# Altium PCB 1mm_18um_2layers_std.PcbDoc
Units mm, origin at the board's own origin, x right, y up, seen from the top; angles counter-clockwise.
Board outline 50 x 90 mm, 2 copper layers (Top Layer, Bottom Layer), stack 1.036 mm thick; 25 components, 14 nets, 63 pads, 4 vias.
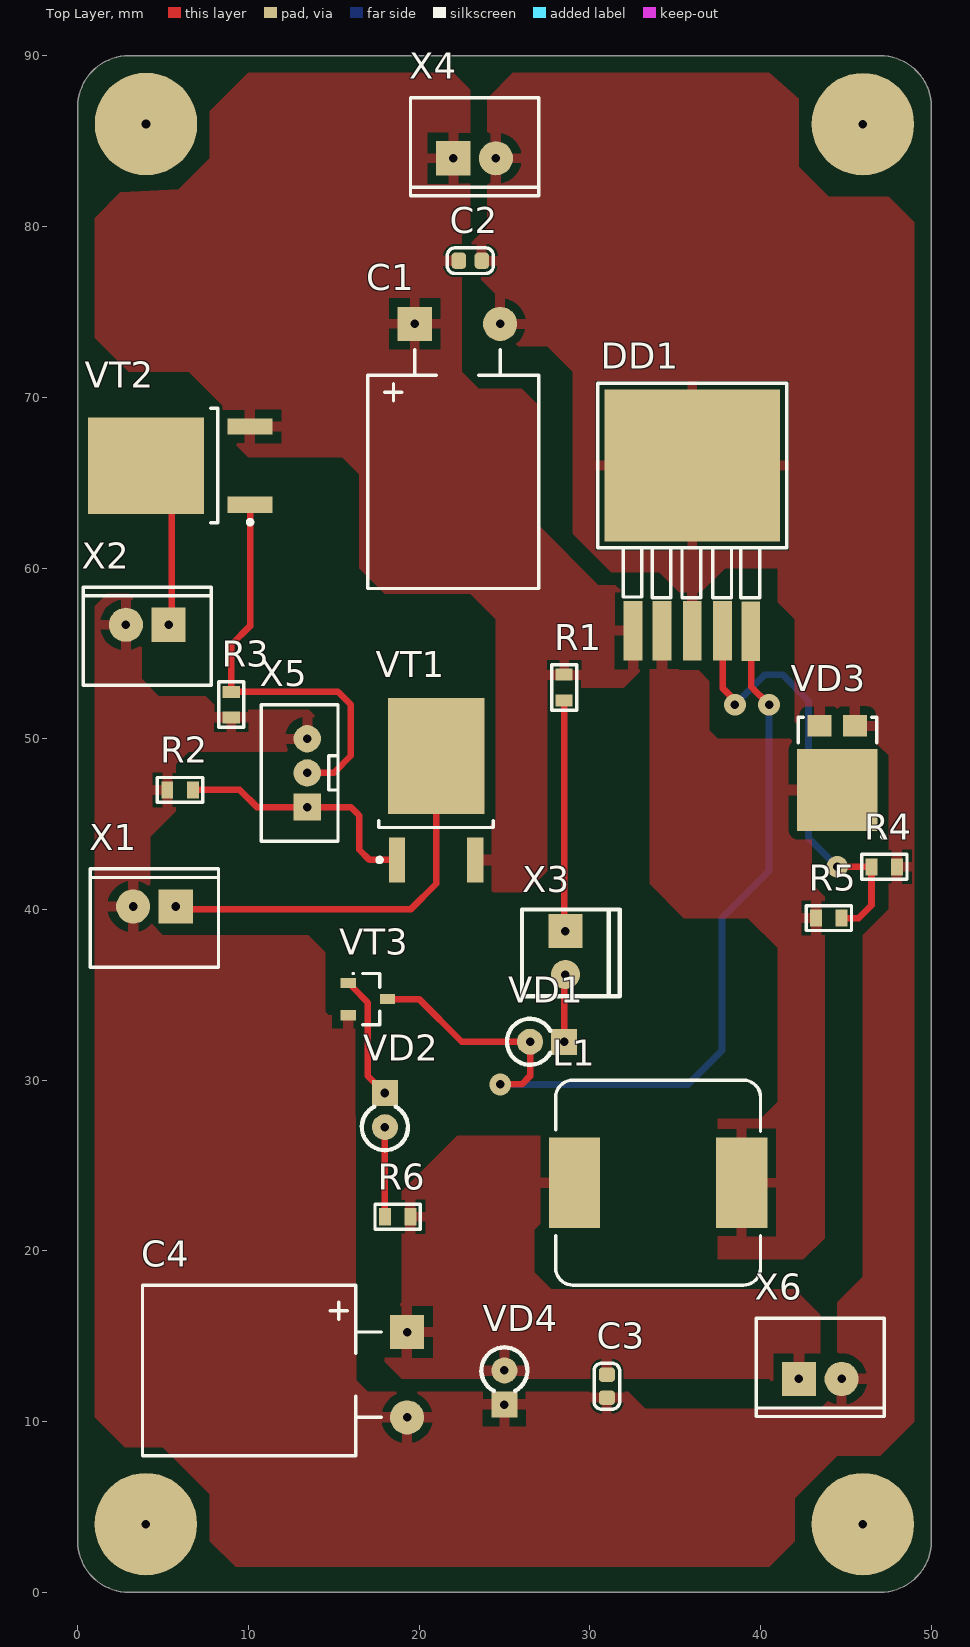
[diagram p0: Top Layer view]
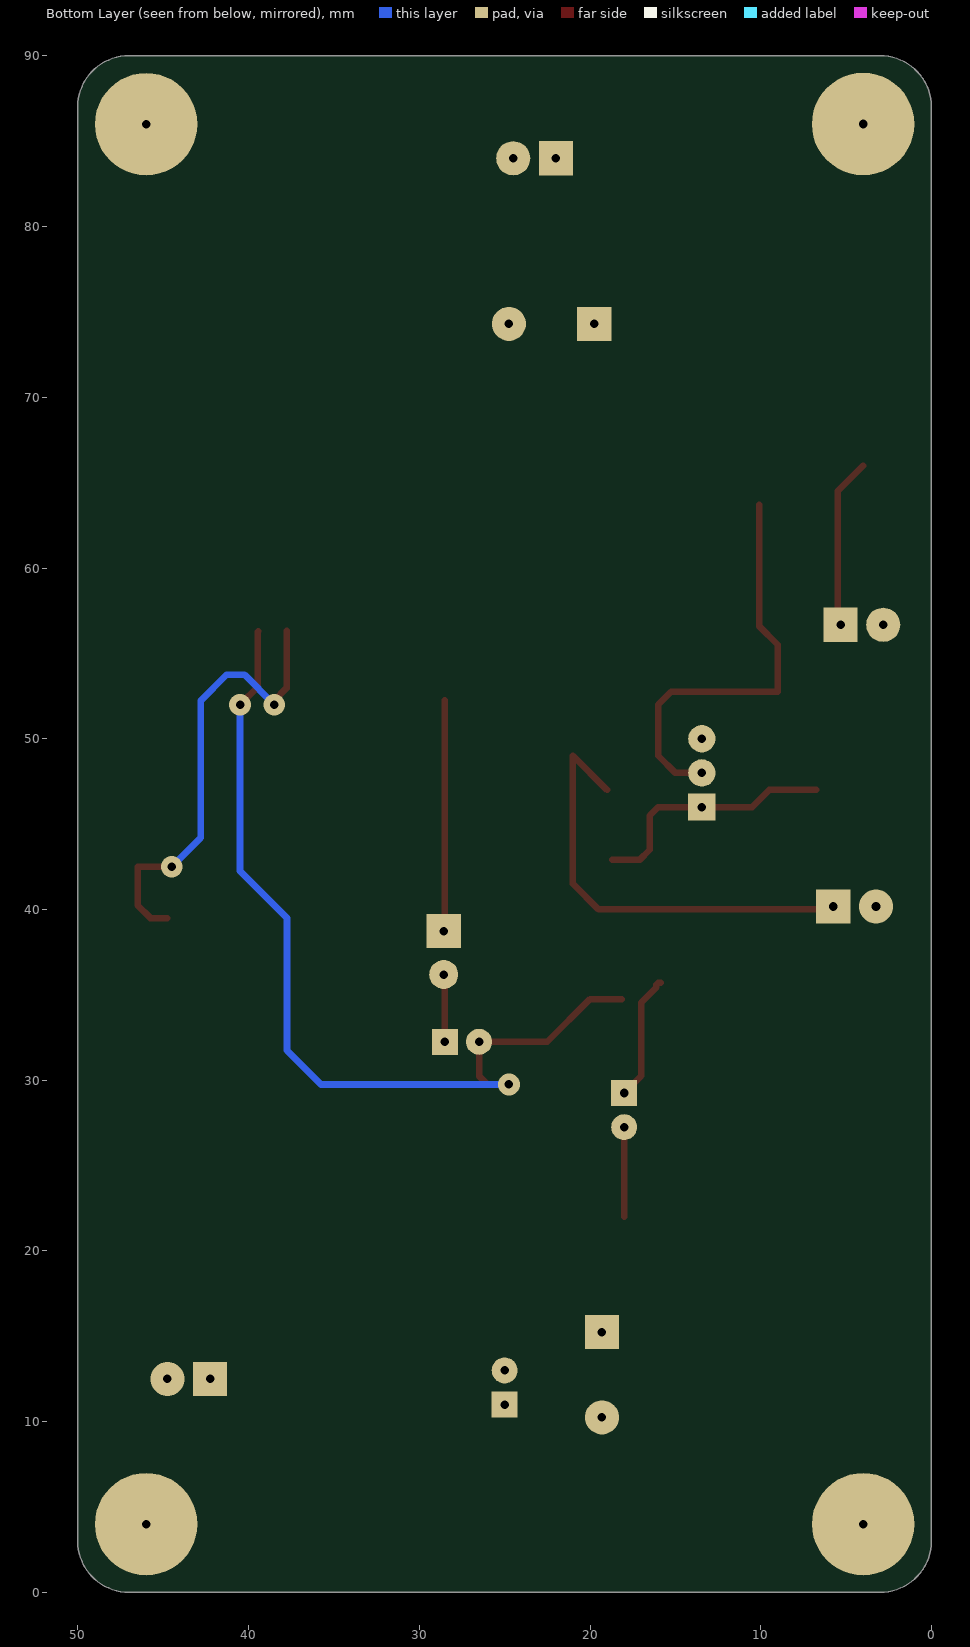
[diagram p1: Bottom Layer view, seen from below]
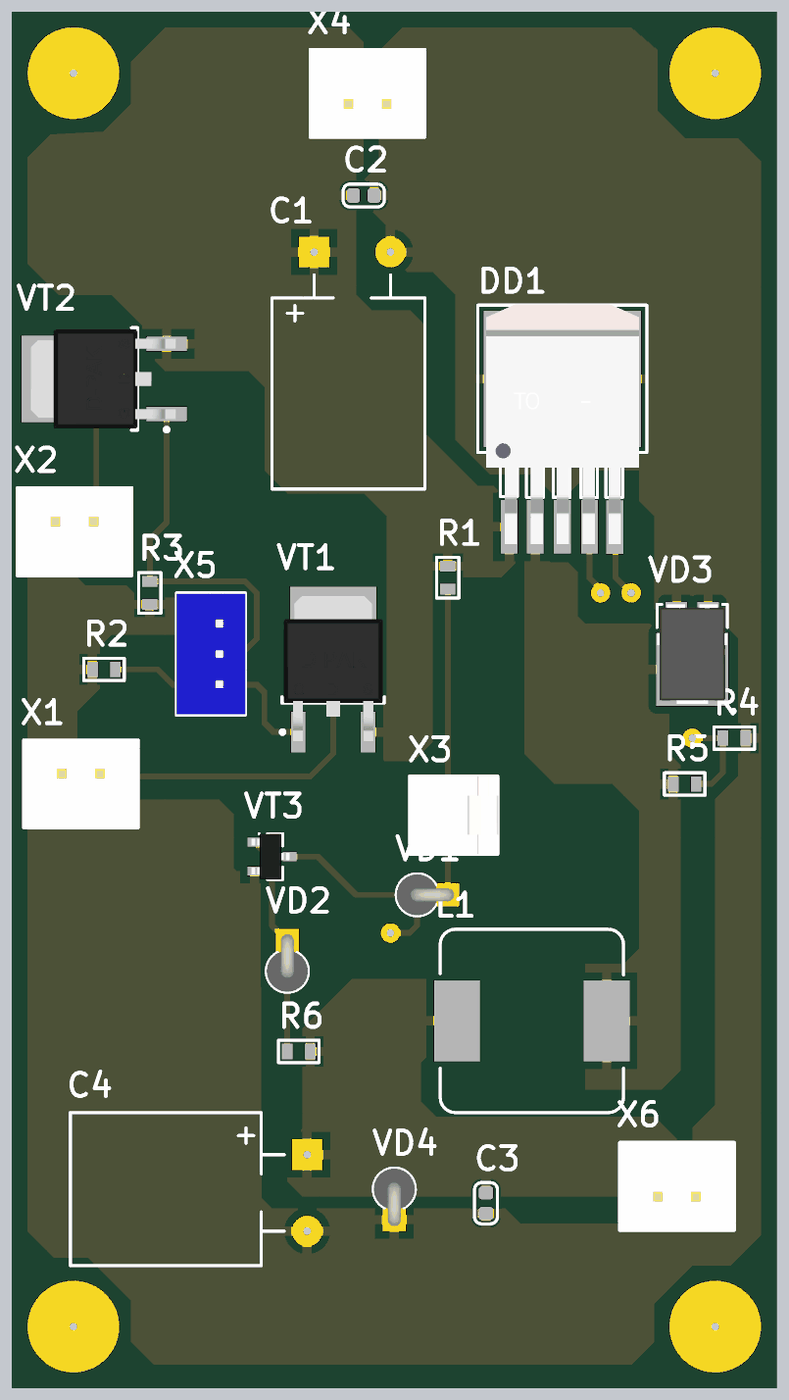
[diagram p2: 3D render of the assembled board from above, using the file's embedded part models]

## Layer stack, top to bottom
Top Solder: solder mask 0.0102, Solder Resist, Dk 3.5
Top Layer: signal copper 0.018
Core 1: core 1, FR4, Dk 4.6
Bottom Layer: signal copper 0.018
Bottom Solder: solder mask 0.0102, Solder Resist, Dk 3.5

## Board outline
0.006,3.006 0.006,87.006 cw(c3.006,87.006) 3.006,90.006 47.006,90.006 cw(c47.006,87.006) 50.006,87.006 50.006,3.006 cw(c47.006,3.006) 47.006,0.006 3.006,0.006 cw(c3.006,3.006)

## Design rules (kind name [scope] priority, off if disabled: settings)
AcuteAngle min_acute_angle [OnCopper] p1: minimum=3.50000000000000E+0001 checktracksonly=FALSE // Минимальный угол между примитивами топологии
BoardOutlineClearance board_outline_clearance_std [NOT (OnLayer('Bottom Overlay') OR OnLayer('Top Overlay'))] p1: gap=0.25 ignorepadtopadclearanceinfootprint=FALSE except(0: Arc-SplitContinuation Track-SplitContinuation SMDPad-SplitContinuation THPad-SplitContinuation Via-SplitContinuation Fill-SplitContinuation Poly-SplitContinuation Region-SplitContinuation Text-SplitContinuation) // Отступ элементов топологии от края фрезеруемой печатной платы
Clearance clearance_outer_18um_std [OnTopLayer OR OnBottomLayer] p1: gap=0.125 ignorepadtopadclearanceinfootprint=TRUE except(0.2: Arc-Fill Arc-Poly Track-Fill Track-Poly SMDPad-SMDPad SMDPad-Fill SMDPad-Poly THPad-Fill THPad-Poly Via-Fill Via-Poly Fill-Fill Fill-Poly Poly-Poly Poly-Region Poly-Text; 0.25: Arc-Hole Track-Hole SMDPad-Hole THPad-Hole Via-Hole Fill-Hole Poly-Hole Region-Hole Text-Hole) // Зазоры на внешних слоях
Clearance clearance_inner_18um_std [NOT (OnTopLayer Or OnBottomLayer)] p2: gap=0.125 ignorepadtopadclearanceinfootprint=FALSE except(0.2: Arc-Fill Arc-Poly Track-Fill Track-Poly SMDPad-SMDPad SMDPad-Fill SMDPad-Poly THPad-Fill THPad-Poly Via-Fill Via-Poly Fill-Fill Fill-Poly Poly-Poly Poly-Region Poly-Text; 0.25: Arc-Hole Track-Hole SMDPad-Hole THPad-Hole Via-Hole Fill-Hole Poly-Hole Region-Hole Text-Hole) // Зазоры на внутренних слоях
ComponentClearance [All] p1: gap=0 collisioncheckmode=3 verticalgap=0 showdistances=FALSE
DiffPairsRouting diff_pairs_routing [All] p1: maxlimit=0.127 minlimit=0.127 mostfreqgap=0.127 toplayer_minwidth=0.143 toplayer_maxwidth=0.143 toplayer_prefwidth=0.143 bottomlayer_minwidth=0.143 bottomlayer_maxwidth=0.143 bottomlayer_prefwidth=0.143 impedanceprofiledriven=TRUE impedanceprofileid={FD46899E-B5A2-4EF5-A302-5D2DB6A51F35} maxuncoupledlength=12.7 // Правила трассировки дифференциальных пар
HoleSize min_hole_size_std [IsPad] p1: absolutevalues=TRUE maxlimit=5.9 minlimit=0.6 maxpercent=80.000 minpercent=20.000 // Диаметр межслойного переходного отверстия
HoleSize min_hole_size_via_std [IsVia] p2: absolutevalues=TRUE maxlimit=5.9 minlimit=0.3 maxpercent=80.000 minpercent=20.000 // Минимальный диаметр монтажного отверстия
HoleToHoleClearance hole_to_hole_clearance_std [All] p1: gap=0.2 allowstackedmicrovias=FALSE // Минимальное расстояние между краями двух отверстий
MinimumAnnularRing min_via_ar_std [All] p1: minimumring=0.15 // Поясок площадки переходного отверстия (Annular ring VIA)
MinimumAnnularRing min_pad_ar_std [All] p2: minimumring=0.2 // Поясок монтажной контактной площадки (Annular ring PAD)
MinimumSolderMaskSliver min_solder_mask_bridge_std [All] p1: minsoldermaskwidth=0.15 // Мнимальная ширина масочного мостика
PlaneClearance plane_clearance_18um_std [All] p1: clearance=0.2 // Отступ полигона (для слоя plane) от элементов топологии
PlaneConnect [All] p1: planeconnectstyle=Relief reliefexpansion=0.5 reliefentries=4 reliefconductorwidth=0.2 reliefairgap=0.2
PolygonConnect poly_connect_to_pad<=0.3 [(AsMM(PadXSize_AllLayers)<=0.301) or (AsMM(PadYSize_AllLayers)<=0.301)] p1: thpad.connectstyle=Relief thpad.reliefconductorwidth=0.2 thpad.reliefentries=4 thpad.polygonreliefangle="90 Angle" thpad.airgapwidth=0.2 smdpad.connectstyle=Relief smdpad.reliefconductorwidth=0.2 smdpad.reliefentries=4 smdpad.polygonreliefangle="90 Angle" smdpad.airgapwidth=0.2 via.connectstyle=Direct via.reliefconductorwidth=0.254 via.reliefentries=4 via.polygonreliefangle="90 Angle" via.airgapwidth=0.254 // Правила подключения полигонов для падов от 0,3мм и меньше
PolygonConnect poly_connect_to_pad<=0.4 [(AsMM(PadXSize_AllLayers)<=0.401) or (AsMM(PadYSize_AllLayers)<=0.401)] p2: thpad.connectstyle=Relief thpad.reliefconductorwidth=0.26 thpad.reliefentries=4 thpad.polygonreliefangle="90 Angle" thpad.airgapwidth=0.2 smdpad.connectstyle=Relief smdpad.reliefconductorwidth=0.26 smdpad.reliefentries=4 smdpad.polygonreliefangle="90 Angle" smdpad.airgapwidth=0.2 via.connectstyle=Direct via.reliefconductorwidth=0.254 via.reliefentries=4 via.polygonreliefangle="90 Angle" via.airgapwidth=0.254 // Правила подключения полигонов для падов от 0,4 и меньше
PolygonConnect poly_connect_to_pad<=0.6 [(AsMM(PadXSize_AllLayers)<=0.601) or (AsMM(PadYSize_AllLayers)<=0.601)] p3: thpad.connectstyle=Relief thpad.reliefconductorwidth=0.33 thpad.reliefentries=4 thpad.polygonreliefangle="90 Angle" thpad.airgapwidth=0.2 smdpad.connectstyle=Relief smdpad.reliefconductorwidth=0.33 smdpad.reliefentries=4 smdpad.polygonreliefangle="90 Angle" smdpad.airgapwidth=0.2 via.connectstyle=Direct via.reliefconductorwidth=0.254 via.reliefentries=4 via.polygonreliefangle="90 Angle" via.airgapwidth=0.254 // Правила подключения полигонов для падов от 0,6мм и меньше
PolygonConnect poly_connect_to_pad<=0.7 [(AsMM(PadXSize_AllLayers)<=0.701) or (AsMM(PadYSize_AllLayers)<=0.701)] p4: thpad.connectstyle=Relief thpad.reliefconductorwidth=0.46 thpad.reliefentries=4 thpad.polygonreliefangle="90 Angle" thpad.airgapwidth=0.2 smdpad.connectstyle=Relief smdpad.reliefconductorwidth=0.46 smdpad.reliefentries=4 smdpad.polygonreliefangle="90 Angle" smdpad.airgapwidth=0.2 via.connectstyle=Direct via.reliefconductorwidth=0.254 via.reliefentries=4 via.polygonreliefangle="90 Angle" via.airgapwidth=0.254 // Правила подключения полигонов для падов от 0,7мм и меньше
PolygonConnect poly_connect_to_pad<=0.8 [(AsMM(PadXSize_AllLayers)<=0.8)or(AsMM(PadYSize_AllLayers)<=0.8)] p5: thpad.connectstyle=Relief thpad.reliefconductorwidth=0.53 thpad.reliefentries=4 thpad.polygonreliefangle="90 Angle" thpad.airgapwidth=0.3 smdpad.connectstyle=Relief smdpad.reliefconductorwidth=0.53 smdpad.reliefentries=4 smdpad.polygonreliefangle="90 Angle" smdpad.airgapwidth=0.2 via.connectstyle=Direct via.reliefconductorwidth=0.254 via.reliefentries=4 via.polygonreliefangle="90 Angle" via.airgapwidth=0.254 // Правила подключения полигонов для падов от 0,8мм и меньше
PolygonConnect poly_connect_to_pad<=1 [(AsMM(PadXSize_AllLayers)<=1.01)or(AsMM(PadYSize_AllLayers)<=1.01)] p6: thpad.connectstyle=Relief thpad.reliefconductorwidth=0.6 thpad.reliefentries=4 thpad.polygonreliefangle="90 Angle" thpad.airgapwidth=0.3 smdpad.connectstyle=Relief smdpad.reliefconductorwidth=0.6 smdpad.reliefentries=4 smdpad.polygonreliefangle="90 Angle" smdpad.airgapwidth=0.2 via.connectstyle=Direct via.reliefconductorwidth=0.254 via.reliefentries=4 via.polygonreliefangle="90 Angle" via.airgapwidth=0.254 // Правила подключения полигонов для падов от 1мм и меньше
PolygonConnect poly_connect_to_pad<=1.3 [(AsMM(PadXSize_AllLayers)<=1.31)or(AsMM(PadYSize_AllLayers)<=1.31)] p7: thpad.connectstyle=Relief thpad.reliefconductorwidth=0.66 thpad.reliefentries=4 thpad.polygonreliefangle="90 Angle" thpad.airgapwidth=0.3 smdpad.connectstyle=Relief smdpad.reliefconductorwidth=0.86 smdpad.reliefentries=4 smdpad.polygonreliefangle="90 Angle" smdpad.airgapwidth=0.2 via.connectstyle=Direct via.reliefconductorwidth=0.254 via.reliefentries=4 via.polygonreliefangle="90 Angle" via.airgapwidth=0.254 // Правила подключения полигонов для падов от 1,3мм и меньше
PolygonConnect poly_connect_to_pad<=1.6 [(AsMM(PadXSize_AllLayers)<=1.61)or(AsMM(PadYSize_AllLayers)<=1.61)] p8: thpad.connectstyle=Relief thpad.reliefconductorwidth=0.8 thpad.reliefentries=4 thpad.polygonreliefangle="90 Angle" thpad.airgapwidth=0.3 smdpad.connectstyle=Relief smdpad.reliefconductorwidth=1 smdpad.reliefentries=4 smdpad.polygonreliefangle="90 Angle" smdpad.airgapwidth=0.2 via.connectstyle=Direct via.reliefconductorwidth=0.254 via.reliefentries=4 via.polygonreliefangle="90 Angle" via.airgapwidth=0.254 // Правила подключения полигонов для падов от 1,6мм и меньше
PolygonConnect poly_connect_to_pad<=1.8 [(AsMM(PadXSize_AllLayers)<=1.8)or(AsMM(PadYSize_AllLayers)<=1.8)] p9: thpad.connectstyle=Relief thpad.reliefconductorwidth=1 thpad.reliefentries=4 thpad.polygonreliefangle="90 Angle" thpad.airgapwidth=0.3 smdpad.connectstyle=Relief smdpad.reliefconductorwidth=1.2 smdpad.reliefentries=4 smdpad.polygonreliefangle="90 Angle" smdpad.airgapwidth=0.2 via.connectstyle=Direct via.reliefconductorwidth=0.254 via.reliefentries=4 via.polygonreliefangle="90 Angle" via.airgapwidth=0.254 // Правила подключения полигонов для падов от 1,8мм и меньше
PolygonConnect poly_connect_to_pad<=2 [(AsMM(PadXSize_AllLayers)<=2.01)or(AsMM(PadYSize_AllLayers)<=2.01)] p10: thpad.connectstyle=Relief thpad.reliefconductorwidth=1.1 thpad.reliefentries=4 thpad.polygonreliefangle="90 Angle" thpad.airgapwidth=0.3 smdpad.connectstyle=Relief smdpad.reliefconductorwidth=1.4 smdpad.reliefentries=4 smdpad.polygonreliefangle="90 Angle" smdpad.airgapwidth=0.2 via.connectstyle=Direct via.reliefconductorwidth=0.254 via.reliefentries=4 via.polygonreliefangle="90 Angle" via.airgapwidth=0.254 // Правила подключения полигонов для падов от 2мм и меньше
PolygonConnect poly_connect_to_pad<=2.3 [(AsMM(PadXSize_AllLayers)<=2.31)or(AsMM(PadYSize_AllLayers)<=2.31)] p11: thpad.connectstyle=Relief thpad.reliefconductorwidth=1.2 thpad.reliefentries=4 thpad.polygonreliefangle="90 Angle" thpad.airgapwidth=0.3 smdpad.connectstyle=Relief smdpad.reliefconductorwidth=1.4 smdpad.reliefentries=4 smdpad.polygonreliefangle="90 Angle" smdpad.airgapwidth=0.2 via.connectstyle=Direct via.reliefconductorwidth=0.254 via.reliefentries=4 via.polygonreliefangle="90 Angle" via.airgapwidth=0.254 // Правила подключения полигонов для падов от 2,3мм и меньше
PolygonConnect poly_connect_to_pad<=2.5 [(AsMM(PadXSize_AllLayers)<=2.51)or(AsMM(PadYSize_AllLayers)<=2.51)] p12: thpad.connectstyle=Relief thpad.reliefconductorwidth=1.2 thpad.reliefentries=4 thpad.polygonreliefangle="90 Angle" thpad.airgapwidth=0.3 smdpad.connectstyle=Relief smdpad.reliefconductorwidth=1.4 smdpad.reliefentries=4 smdpad.polygonreliefangle="90 Angle" smdpad.airgapwidth=0.2 via.connectstyle=Direct via.reliefconductorwidth=0.254 via.reliefentries=4 via.polygonreliefangle="90 Angle" via.airgapwidth=0.254 // Правила подключения полигонов для падов от 2,5мм и меньше
PolygonConnect poly_connect_to_pad<=2.7 [(AsMM(PadXSize_AllLayers)<=2.71)or(AsMM(PadYSize_AllLayers)<=2.71)] p13: thpad.connectstyle=Relief thpad.reliefconductorwidth=1.4 thpad.reliefentries=4 thpad.polygonreliefangle="90 Angle" thpad.airgapwidth=0.3 smdpad.connectstyle=Relief smdpad.reliefconductorwidth=1.6 smdpad.reliefentries=4 smdpad.polygonreliefangle="90 Angle" smdpad.airgapwidth=0.2 via.connectstyle=Direct via.reliefconductorwidth=0.254 via.reliefentries=4 via.polygonreliefangle="90 Angle" via.airgapwidth=0.254 // Правила подключения полигонов для падов от 2,7мм и меньше
PolygonConnect poly_connect_to_pad<=3 [(AsMM(PadXSize_AllLayers)<=3.01)or(AsMM(PadYSize_AllLayers)<=3.01)] p14: thpad.connectstyle=Relief thpad.reliefconductorwidth=1.6 thpad.reliefentries=4 thpad.polygonreliefangle="90 Angle" thpad.airgapwidth=0.3 smdpad.connectstyle=Relief smdpad.reliefconductorwidth=1.8 smdpad.reliefentries=4 smdpad.polygonreliefangle="90 Angle" smdpad.airgapwidth=0.2 via.connectstyle=Direct via.reliefconductorwidth=0.254 via.reliefentries=4 via.polygonreliefangle="90 Angle" via.airgapwidth=0.254 // Правила подключения полигонов для падов от 3мм и меньше
PolygonConnect poly_connect_to_pad<=7 [(AsMM(PadXSize_AllLayers)<7.01)or(AsMM(PadYSize_AllLayers)<=7.01)] p15: thpad.connectstyle=Relief thpad.reliefconductorwidth=2 thpad.reliefentries=4 thpad.polygonreliefangle="90 Angle" thpad.airgapwidth=0.4 smdpad.connectstyle=Relief smdpad.reliefconductorwidth=2 smdpad.reliefentries=4 smdpad.polygonreliefangle="90 Angle" smdpad.airgapwidth=0.3 via.connectstyle=Direct via.reliefconductorwidth=0.254 via.reliefentries=4 via.polygonreliefangle="90 Angle" via.airgapwidth=0.254 // Правила подключения полигонов для падов от 7мм и меньше
PolygonConnect poly_connect_to_pad [All] p16: thpad.connectstyle=Relief thpad.reliefconductorwidth=0.25 thpad.reliefentries=4 thpad.polygonreliefangle="90 Angle" thpad.airgapwidth=0.2 smdpad.connectstyle=Relief smdpad.reliefconductorwidth=0.25 smdpad.reliefentries=4 smdpad.polygonreliefangle="90 Angle" smdpad.airgapwidth=0.2 via.connectstyle=Direct via.reliefconductorwidth=0.25 via.reliefentries=4 via.polygonreliefangle="90 Angle" via.airgapwidth=0.2 // Правила подключения полигонов общие
RoutingCorners [All] p1 off: cornerstyle=45-Degree minsetback=2.5 maxsetback=2.5
RoutingVias [All] p1: holewidth=0.3 width=0.6 viastyle="Through Hole" minholewidth=0.3 minwidth=0.6 maxholewidth=5.9 maxwidth=6.4
SilkToSilkClearance silk_to_silk_clearance_std [All] p1 off: silktosilkclearance=0.15 // Отступ текста шелкографии от других примитивов шелкографии
SilkToSolderMaskClearance silk_to_solder_mask_clearance_std [IsPad] p1 off: minsilkscreentomaskgap=0.15 clearancetoexposedcopper=FALSE // Минимальное расстояние между элементами шелкографии и вскрытой медью
SolderMaskExpansion solder_mask_expansion_std [All] p1: expansion=0.05 istentingtop=FALSE // Припуск паяльной масски
UnRoutedNet [All] p1: checkbadconnections=TRUE
Width width_18um_std [All] p1: maxlimit=10 minlimit=0.125 preferedwidth=0.15 checkconnectedcopper=TRUE // Ширина проводников (общая)
19 further rules are at their usual default settings.

## Components (designator, comment, footprint, x,y, rotation, side; value= is the part's Value field where it differs from the comment)
C1 "470мк" CAPALUM_10x12.5 22,67 r90 top
C2 "0,1мк" C0603 23,78 r180 top
C3 "0,1мк" C0603 31,12.075 r90 top
C4 "470мк" CAPALUM_10x12.5 12,13 r0 top
DD1 "LM2596" D2PAK_5 35.85,60.675 r0 top
L1 "NoName" CDRH124 34,24 r180 top value=47мк
R1 "10к" R0603 28.5,53 r270 top
R2 "10к" R0603 6,47 r0 top
R3 "10к" R0603 9,52 r90 top
R4 "1к" R0603 47.25,42.5 r180 top
R5 "3к" R0603 44,39.5 r180 top
R6 "4,7к" R0603 18.75,22 r0 top
VD1 "1N4007" "DO-41 VERTICAL" 26.5,32.25 r270 top
VD2 "BZX85C5V1" "DO-41 VERTICAL" 18,27.25 r0 top
VD3 "10S45SP" TO-277A 44.5,48 r270 top
VD4 "BZX85C5V1" "DO-41 VERTICAL" 25,13 r180 top
VT1 "30N06" D-PAK 21,47 r90 top
VT2 "30N06" D-PAK 6,66 r180 top
VT3 "BC847B" SOT23-3 17,34.75 r0 top
X1 "DS1069-2M (CWF-2)" CWF-2 4.5,39.5 r180 top
X2 "DS1069-2M (CWF-2)" CWF-2 4.076,56 r180 top
X3 "640456-2" JST-640456-2 31.75,40 r180 top
X4 "DS1069-2M (CWF-2)" CWF-2 23.25,84.675 r0 top
X5 "DS1066-03M (MW-3M)" MW-3M 13,48 r90 top
X6 "DS1069-2M (CWF-2)" CWF-2 43.5,13.175 r0 top

## Footprints (in the part's own frame and the unit in brackets; to place one, negate y for a bottom-side part, rotate by r counter-clockwise, add the part's x,y. Pads: shape width x height; smd on the part's side, far side on the other; paste and mask are expansions set on the pad)
C0603 [mm] "Chip Capacitor, 2-Leads, Body 1,60x0,80mm, IPC Medium Density"
  rrect50% 0.85x0.95 smd: 1(-0.675,0) 2(0.675,0)
  Top Layer pour cut-out: -0.254,0.5 -0.254,-0.5 0.254,-0.5 0.254,0.5
  silkscreen extent -1.35,-0.75 1.35,0.75, body extent -0.85,-0.45 0.85,0.45, height 0.9
CAPALUM_10x12.5 [mm] "Электролитический алюминиевый конденсатор с радиальными выводами 10*12.5мм"
  rect 2x2 hole 0.5: 1(7.3,2.25)
  round 2 hole 0.5: 2(7.3,-2.75)
  silkscreen extent -8.2,-5 5.8,5, body extent -8.2,-4.99 7.6,4.99, height 9
CDRH124 [mm]
  rect 3x5.3 smd: 1(-4.9,0) 2(4.9,0)
  silkscreen extent -6,-6 6,6, body extent -6.15,-6 6.15,6.3, height 4.8
CWF-2 [mm]
  rect 2x2 hole 0.5: 1(-1.25,-0.675)
  round 2 hole 0.5: 2(1.25,-0.675)
  silkscreen extent -3.75,-2.88 3.75,2.88, body extent -3.75,-2.87 3.75,2.88, height 7
D2PAK_5 [mm]
  rect 1.1x3.5 smd: 1(-3.325,-4.35) 2(-1.625,-4.35) 3(0.15,-4.35) 4(1.925,-4.35) 5(3.575,-4.375)
  rect 10.3x8.9 smd: TP(0.15,5.325)
  silkscreen extent -5.38,-2.42 5.68,10.15, body extent -4.82,-5.47 5.18,10.2, height 5.18
D-PAK [mm] "D-PAK, 3-Pads, Body 6,21x6,73mm (max), IPC High Density"
  rect 2.65x0.95 smd: 1(-4.1,2.29) 3(-4.1,-2.29)
  rect 6.8x5.65 smd: 2(2,0)
  silkscreen extent -4.22,-3.35 -1.8,3.44, body extent -4.7,-3.25 4.8,3.25, height 2.3
"DO-41 VERTICAL" [mil]
  rect 60x60 hole 19.68: 1(0,78.74)
  round 60 hole 19.68: 2(0,0)
  silkscreen extent -53,-53 53,47, body extent -53,-53 53,96, height 281
JST-640456-2 [mm]
  rect 2x2 hole 0.5: 1(3.18,1.27)
  round 1.7 hole 0.5: 2(3.18,3.81)
  silkscreen extent 0,0 5.72,5.08, body extent -0.06,0 5.78,5.08, height 10.03
MW-3M [mm]
  rect 1.6x1.6 hole 0.5: 1(-2,-0.45)
  round 1.6 hole 0.5: 2(0,-0.45) 3(2,-0.45)
  silkscreen extent -4,-2.25 4,2.25, body extent -3.95,-2.25 3.95,2.25, height 6
R0603 [mm]
  rect 0.7x1 smd: 1(-0.75,0) 2(0.75,0)
  silkscreen extent -1.33,-0.73 1.33,0.73, body extent -0.8,-0.43 0.8,0.43, height 0.45
SOT23-3 [mm] "SOT23, 3-Leads, Body 2,90x2,30mm, Pitch 0,95mm, IPC Medium Density"
  rect 0.9x0.6 smd: 1(-1.15,0.95) 2(-1.15,-0.95) 3(1.15,0)
  silkscreen extent -0.9,-1.5 0.7,1.55, body extent -1.35,-1.5 1.15,1.5, height 1.05
TO-277A [mm] "SMPC (TO-277A)"
  rrect1% 1.27x1.4 smd: 1(-2.76,1.04) 2(-2.76,-1.04)
  rrect1% 4.8x4.72 smd: 3(1,0)
  silkscreen extent -3.25,-2.3 3.73,2.7, body extent -3.25,-2.3 3.25,2.3, height 1.2

## Part data
C1 C4: library part SH035M0470B5s-1015, "Конденсатор эл.лит. алюм. 470мкФ 35В", Manufacturer=EPCOS, Voltage=35В, ESR=0,3Ом, Name=B41858C6157M
C2 C3: library part CC0603JPX7R9BB104, "Конденсатор кер. 0,1мкФ 50В", Manufacturer=Yageo, Voltage=50В, Name=CC0603JPX7R9BB104, TKE=X7R
DD1: "регулируемый стабилизатор напряжения", Name=LM2596
L1: "Катушка с сердечником 47мкГн 0,8А", I saturation=5,7А, Name=CDRH124NP-4R7MC, R=0,014
R1 R2 R3: library part RC0603FR-0710KL, "Резистор 10кОм 0,063Вт 1%", Manufacturer=YAGEO, Tolerance=1%, Name=RC0603FR-0710KL
R4: library part RC0603FR-071KL, "Резистор 1кОм 0,063Вт 1%", Manufacturer=YAGEO, Tolerance=1%, Name=RC0603FR-071KL
R5: library part RC0603FR-073KL, "Резистор 3кОм 0,063Вт 1%", Manufacturer=YAGEO, Tolerance=1%, Name=RC0603FR-073KL
R6: library part RC0603FR-074K7L, "Резистор 4,7кОм 0,063Вт 1%", Manufacturer=YAGEO, Tolerance=1%, Name=RC0603FR-074K7L
VD1: "Диод выпрямиельный 1000В 1А", Name=1N4007
VD2 VD4: "Стабилитрон 5,1В", Name=BZX85C5V1
VD3: "Диод Шоттки 45В 10А", Manufacturer=YFW, Name=10S45SP
VT1 VT2: "N-MOSFET 60В 30А", Manufacturer="UMW Youtai Semiconductor", Name=30N06
VT3: "Биполярный NPN транзистор 45В 100мА", Manufacturer="NXP Semiconductor", Name=BC847B
X1 X2 X4 X6: library part CWF-2, "Разъем - 2 конт. прямая вилка на плату", Name="DS1069-2M (CWF-2)"
  X1: Contact_1=MAG1, Contact_2=GND
  X2: Contact_1=MAG2, Contact_2=GND
  X4: Contact_1=VIN, Contact_2=GND
  X6: Contact_1=VOUT, Contact_2=GND_OUT
X3: library part JST-640456-2, "Разъем - 2 конт. прямая вилка на плату", Contact_1=BUT_1, Contact_2=BUT_2, Name=640456-2
X5: library part MW-3M, "Разъем - 3 конт. прямая вилка на плату", Contact_1=PIN1, Contact_2=PIN2, Contact_3=GND, Name="DS1066-03M (MW-3M)"

## Free pads (board coordinates)
  round 6 hole 0.5: ""(4,4) ""(4.006,86.006) ""(46,4) ""(46,86)

## Via types
v1: diameter 1.27, hole 0.5, Top Layer to Bottom Layer, 4 vias

## Nets (pads, with @x,y where several pads share a name; then routed paths per layer and width w, separated by ;. In a path a pad name is that pad's centre, name@x,y a point inside that pad or via, vN(x,y) a via of type N, cw(c..) or ccw(c..) an arc to the next point about the centre after c; other vN are vias at no path point)
FB: DD1.4 R4.2 R5.1 | length 27
  Top Layer w0.381: DD1.4 37.775,52.966 38.5,52.241 v1(38.5,52) ; v1(44.5,42.5) R4.2 46.5,40.25 45.75,39.5 R5.1
  Bottom Layer w0.4: v1(38.5,52) 40.25,53.75 41.277,53.75 42.803,52.223 42.803,44.197 v1(44.5,42.5)
GND: C1.2 C2.1 C3.1 C4.2 DD1.3 DD1.TP R2.1 R3.1 R4.1 VD3.1 VD3.2 VD4.1 VT3.2 X1.2 X2.2 X4.2 X5.3 X6.2
MAG1: VT1.2 X1.1 | length 26.3
  Top Layer w0.381: X1.1 5.925,40 19.5,40 21,41.5 VT1.2 VT1.2@19,47
MAG2: VT2.2 X2.1 | length 10
  Top Layer w0.381: VT2.2 5.5,64.5 5.5,56.849 X2.1
NetR1_2: R1.2 X3.1 | length 13.8
  Top Layer w0.381: X3.1@28.5,38.5 R1.2
NetR6_1: R6.1 VD2.2 | length 5.2
  Top Layer w0.381: R6.1 VD2.2
NetVD1_1: VD1.1 X3.2 | length 4
  Top Layer w0.381: VD1.1 28.5,36.12 X3.2
NetVD2_1: VD2.1 VT3.1 | length 7.4
  Top Layer w0.381: VT3.1 16,35.7 16.11,35.591 16.11,35.44 17,34.55 17,30.25 VD2.1
ON/OFF: DD1.5 VD1.2 VT3.3 | length 53.3
  Top Layer w0.381: VT3.3 20,34.75 22.5,32.25 VD1.2 26.5,30.241 26.009,29.75 v1(24.75,29.75) ; DD1.5 39.462,56.263 39.462,53.038 v1(40.5,52)
  Bottom Layer w0.4: v1(24.75,29.75) 35.75,29.75 37.75,31.75 37.75,39.5 40.5,42.25 v1(40.5,52)
OUTPUT: DD1.2 L1.1 R5.2 VD3.3
PIN1: R2.2 VT1.1 X5.1 | length 14.8
  Top Layer w0.381: R2.2 9.5,47 10.5,46 X5.1 16,46 16.5,45.5 16.5,43.5 17.1,42.9 VT1.1
PIN2: R3.2 VT2.1 X5.2 | length 24.7
  Top Layer w0.381: VT2.1 10.1,56.6 9,55.5 R3.2 9.15,52.75 15.25,52.75 16,52 16,49 15,48 X5.2
VIN: C1.1 C2.2 DD1.1 R1.1 VT1.3 VT2.3 X4.1
VOUT: C3.2 C4.1 L1.2 R6.2 VD4.2 X6.1

## Polygon pours and split planes (outlines as drawn)
VOUT on Top Layer "NONET_L-01_P-001" (solid, pour order 4): 40.5,12.5 41.5,11.5 43,11.5 43.5,12 43.5,16.25 42,17.75 27.75,17.75 26.75,18.75 26.75,21.25 27.625,22.125 30.125,22.125 30.75,22.75 30.75,25.75 29.75,26.75 22.25,26.75 19,23.5 19,17 18,16 18,13.5 19,12.5 23.75,12.5
GND on Top Layer "NONET_L-01_P-001" (solid, pour order 0): 23,77.5 24.75,75.75 24.75,73.75 24.973,73.75 25.723,73 27.5,73 29,71.5 29,62 31.25,59.75 34.075,59.75 35.25,58.575 35.25,55.25 35.625,54.875 36.125,54.875 36.5,55.25 36.5,58.575 37.925,60 41,60 41,58 42,57 42,51 43,50 46.535,50 47.5,49.035 47.5,40 46,38.5 46,18.5 44.5,17 44.5,11.75 43.5,10.75 33.25,10.75 32.25,11.75 17,11.75 16.322,12.428 16.25,33.25 15.85,33.8 14.7,33.8 14.625,33.875 14.5,34 14.5,37.5 13.5,38.5 5,38.5 4.25,39.25 4.25,44.25 5.75,45.75 5.75,48.5 6.5,49.25 13.5,49.25 14,49.75 14,51.25 13.55,51.7 8.3,51.7 7.5,52.5 4.75,52.5 3.75,53.5 3.75,57.75 3,58.5 1.75,58.5 1,57.75 1,10.25 2.75,8.5 5,8.5 7.75,5.75 7.75,3 9.25,1.5 40.5,1.5 42,3 42,5.5 44.5,8 47,8 49,10 49,51.5 49,77 49,80.25 47.5,81.75 44,81.75 42.25,83.5 42.25,87.5 40.5,89 25.5,89 24,87.5 24,80 23,79
OUTPUT on Top Layer "NONET_L-01_P-001" (solid, pour order 3): 37.5,19.5 37.5,27.5 37.5,27.75 40,27.75 41,28.75 41,37.75 39.25,39.5 35.5,39.5 33.5,41.5 33.5,53.5 33.5,57.75 33.75,58 34.5,58 34.75,57.75 34.75,54.5 35.25,54 36.375,54 37,53.375 37,50.5 37.5,50 41.75,50 42.5,49.25 44.75,49.25 46.5,47.5 46.5,45.75 45,44.25 43,44.25 43,41.5 43.75,40.75 43.75,20.75 42.5,19.5
VIN on Top Layer "NONET_L-01_P-001" (solid, pour order 2): 1,80.5 2.5,82 5.931,82.181 7.75,84 7.75,86.75 10,89 22,89 23,88 23,80 22.5,79.5 22.5,71.5 23.5,70.5 26,70.5 27,69.5 27,62.5 30.5,59 31.5,59 33,57.5 33,54 32,53 27.5,53 27.5,42.25 26.25,41 24,41 23,42 23,43.75 24.5,45.25 24.5,57 23,58.5 18,58.5 16.5,60 16.5,65.5 15.5,66.5 10,66.5 8.5,68 8.5,69.5 6.5,71.5 3,71.5 1,73.5

## Silkscreen, mask and mechanical layers (free items; w line width, h text height)
Board:
  circle w0.013: c4.006,4.006 r1.575
  circle w0.013: c46.006,86.006 r1.575
  circle w0.013: c46.006,4.006 r1.575
  circle w0.013: c4.006,86.006 r1.575
  lines w0.013: 0.006,3.006 ccw(c3.006,3.006) 3.006,0.006 47.006,0.006 ccw(c47.006,3.006) 50.006,3.006 50.006,87.006 ccw(c47.006,87.006) 47.006,90.006 3.006,90.006 ccw(c3.006,87.006) 0.006,87.006 0.006,3.006